# Altium PCB Line_trigger.PCBDOC (part 1 of 2)
Units mm, origin at the board's own origin, x right, y up, seen from the top; angles counter-clockwise.
Board outline 120 x 50.5 mm, 2 copper layers (TOP, BOT), stack 1.57 mm thick; 102 components, 41 nets, 280 pads, 76 vias.
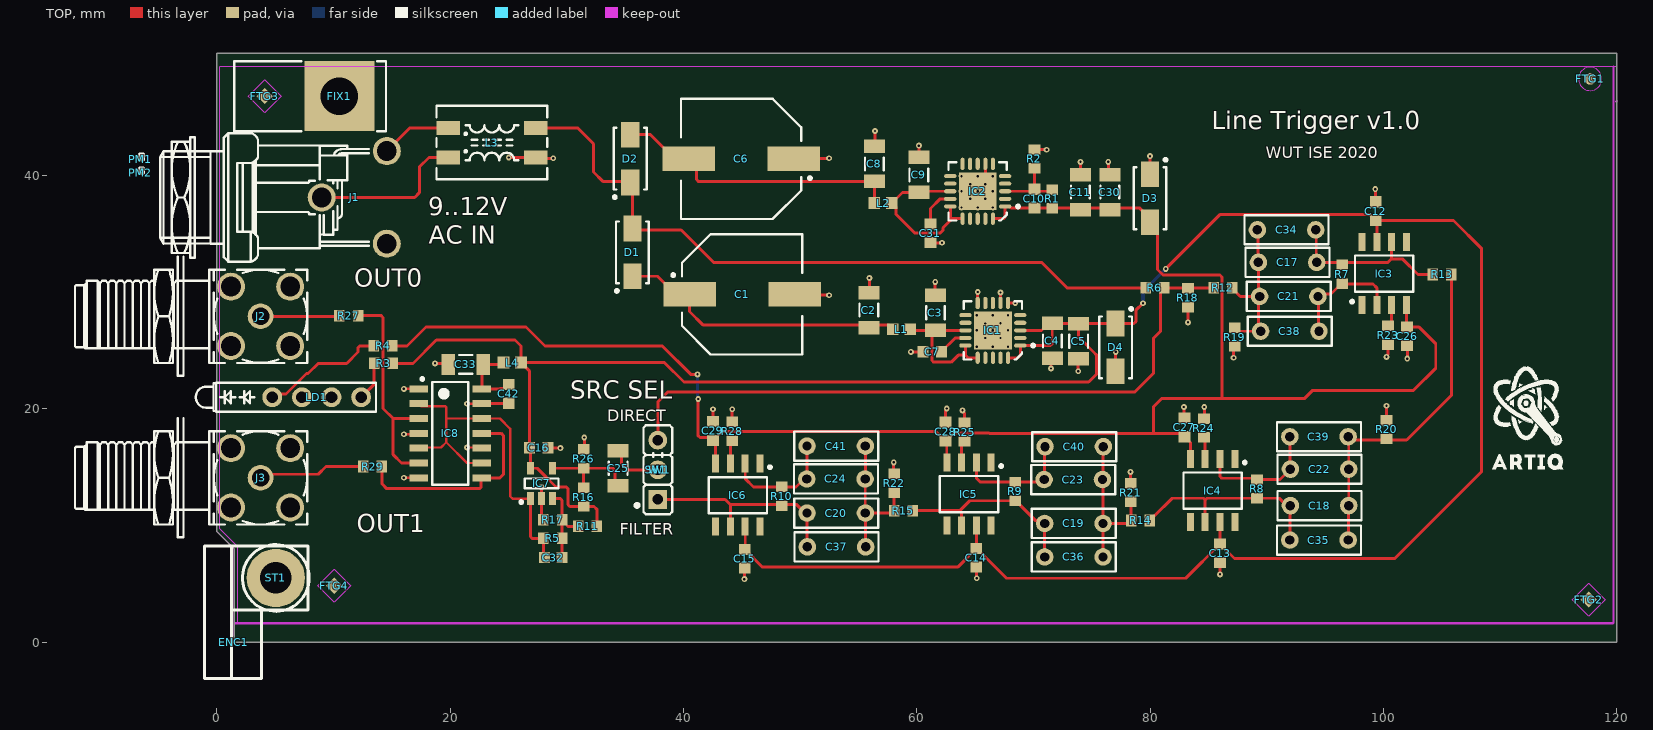
[diagram p0: TOP view]
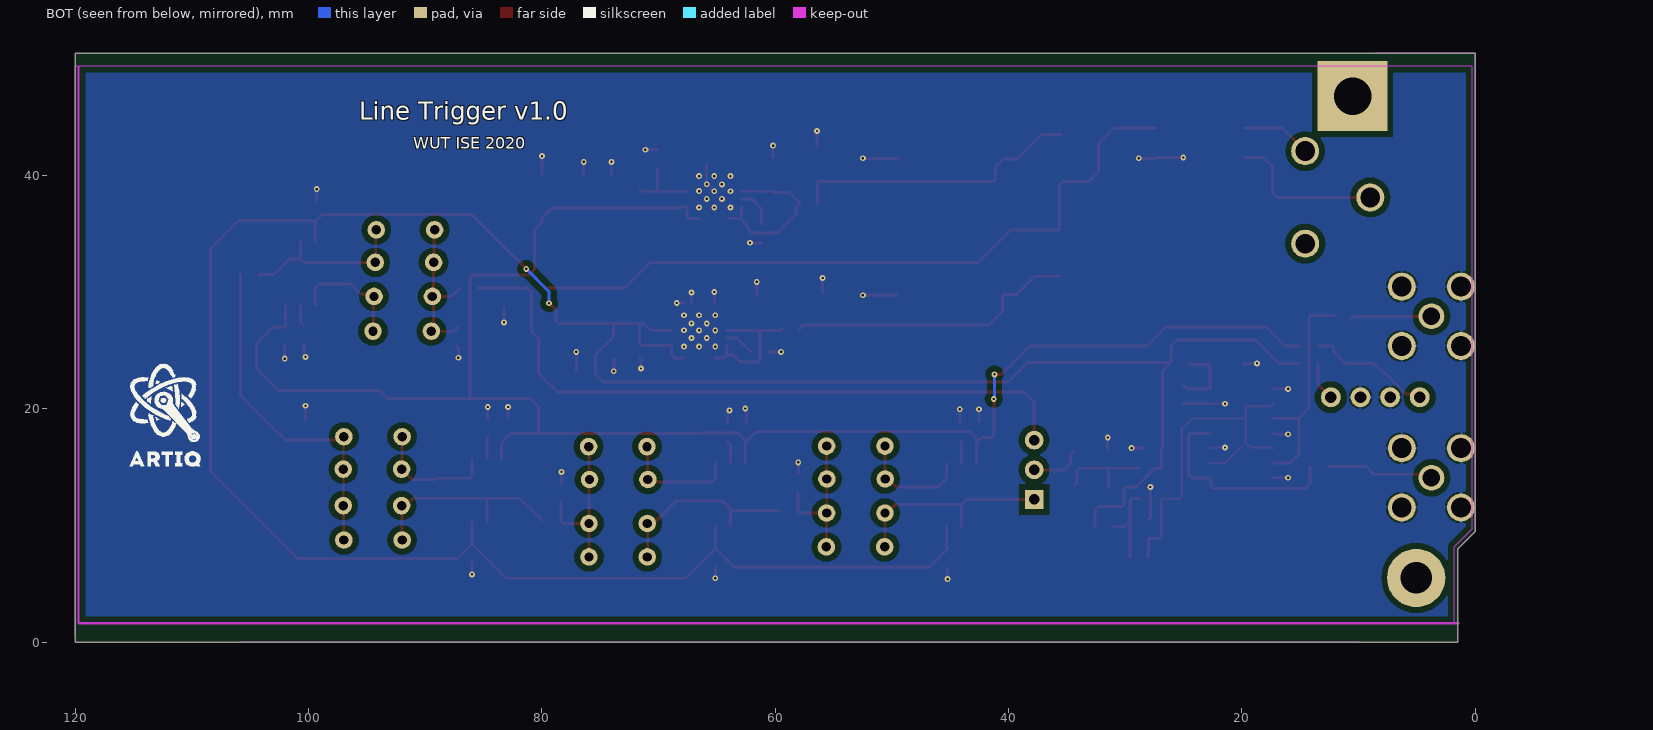
[diagram p1: BOT view, seen from below]
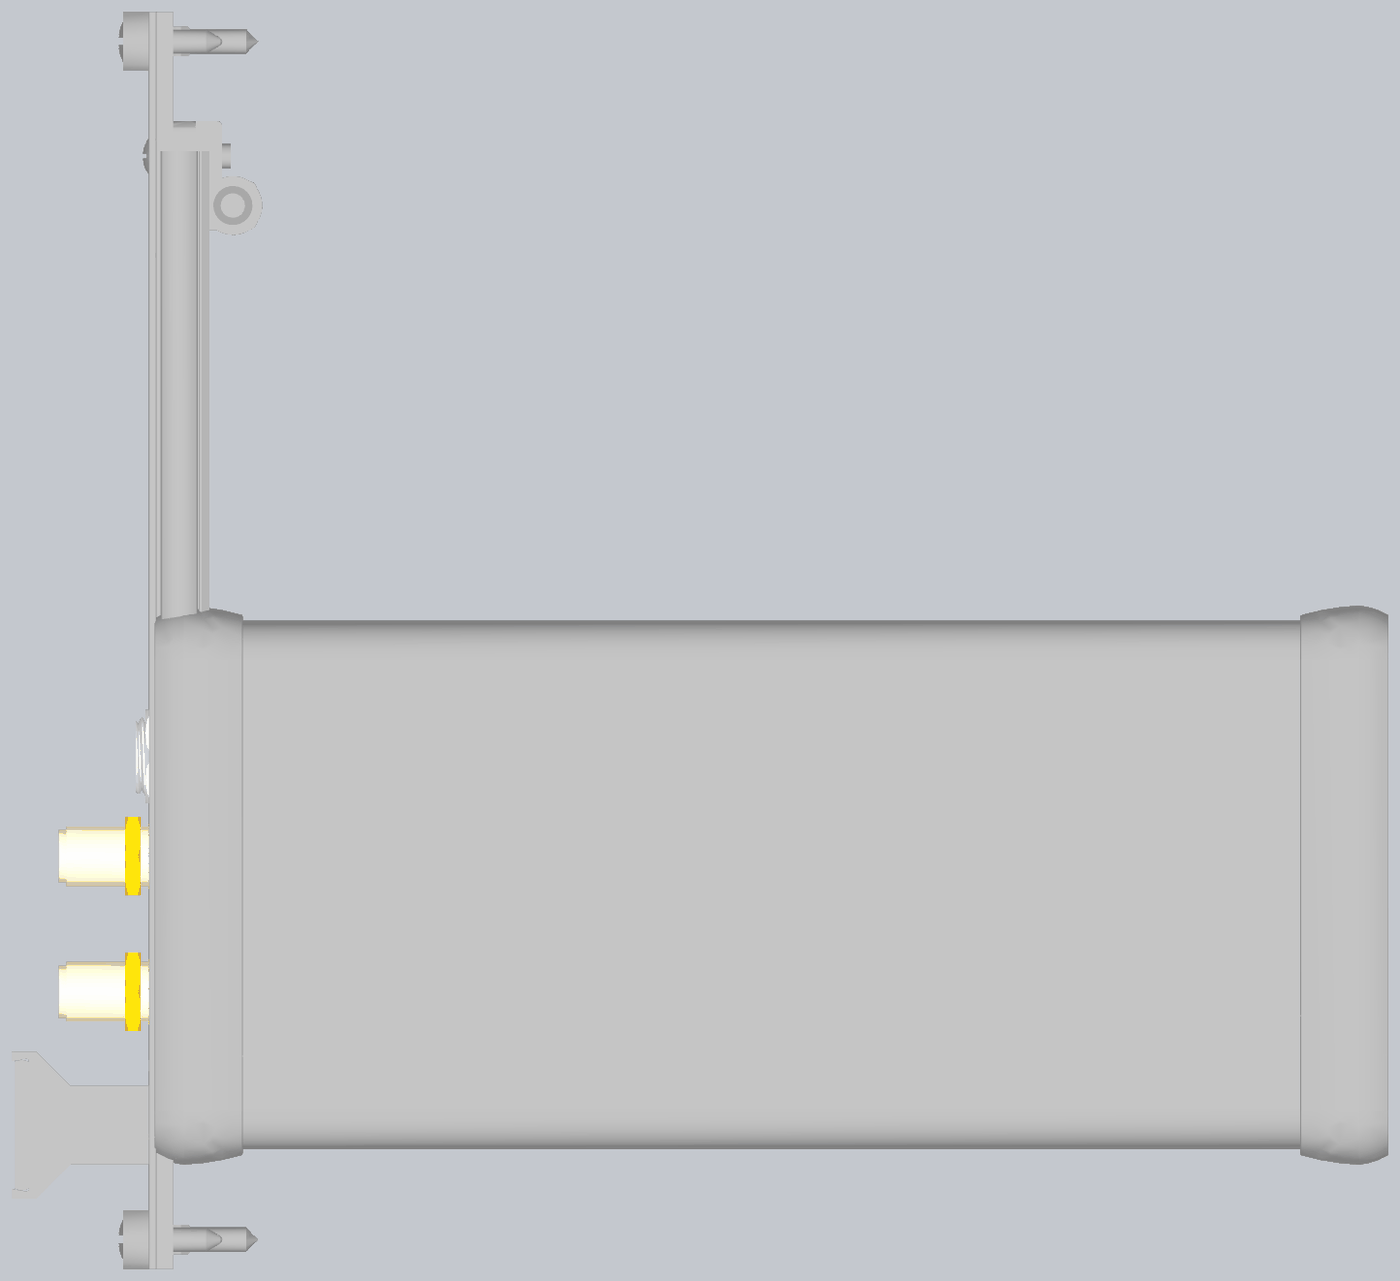
[diagram p2: 3D render of the assembled board from above, using the file's embedded part models]

## Layer stack, top to bottom
TopSolder: solder mask 0.01, Solder Resist, Dk 3.5
TOP: signal copper 0.035
Dielectric2: core 1.5, Core-042, Dk 4.6
BOT: signal copper 0.035
BottomSolder: solder mask 0.01, Solder Resist, Dk 3.5

## Board outline
0,14.5 0,50.5 9.038,50.5 120,50.5 120,0 1.5,0 1.5,8 0,9.5

## Design rules (kind name [scope] priority, off if disabled: settings)
AcuteAngle [All] p1: minimum=6.00000000000000E+0001 checktracksonly=FALSE
Clearance [All] p1: gap=0.15 ignorepadtopadclearanceinfootprint=FALSE except(0.5: Arc-Poly Track-Poly SMDPad-Poly THPad-Poly Via-Poly Fill-Poly Poly-Poly)
ComponentClearance [All] p1: gap=0 collisioncheckmode=3 verticalgap=0 showdistances=FALSE
DiffPairsRouting [All] p1: maxlimit=0.152 minlimit=0.127 mostfreqgap=0.152 toplayer_minwidth=0.127 toplayer_maxwidth=0.152 toplayer_prefwidth=0.152 bottomlayer_minwidth=0.127 bottomlayer_maxwidth=0.152 bottomlayer_prefwidth=0.152 maxuncoupledlength=12.7
FabricationTestPointUsage TestPointUsage [All] p1: valid=0 allowmultiple=FALSE
FabricationTestpoint Testpoint [All] p1: side=3 testpointundercomponent=TRUE minsize=1.016 maxsize=2.54 preferedsize=1.524 minholesize=0.508 maxholesize=1.016 preferedholesize=0.813 testpointgrid=0.025 allowsidetop=TRUE allowsidebottom=TRUE usegrid=TRUE gridtolerance=0
Height [All] p1: minheight=0 maxheight=40 prefheight=40
HoleSize [All] p1: absolutevalues=TRUE maxlimit=3.81 minlimit=0.025 maxpercent=80.000 minpercent=20.000
HoleToHoleClearance [All] p1: gap=0.025 allowstackedmicrovias=TRUE
MinimumSolderMaskSliver [All] p1: minsoldermaskwidth=0
PlaneClearance PlaneClearance_HV [InNetClass('HV')] p1: clearance=1
PlaneClearance [All] p2: clearance=0.2
PlaneConnect [All] p1: pad.planeconnectstyle=Relief pad.reliefexpansion=0.254 pad.reliefentries=4 pad.reliefconductorwidth=0.254 pad.reliefairgap=0.152 via.planeconnectstyle=Direct via.reliefexpansion=0.508 via.reliefentries=4 via.reliefconductorwidth=0.254 via.reliefairgap=0.254
PolygonConnect PolygonConnect_pad [All] p1: thpad.connectstyle=Relief thpad.reliefconductorwidth=0.254 thpad.reliefentries=4 thpad.polygonreliefangle="90 Angle" thpad.airgapwidth=0.152 smdpad.connectstyle=Relief smdpad.reliefconductorwidth=0.254 smdpad.reliefentries=4 smdpad.polygonreliefangle="90 Angle" smdpad.airgapwidth=0.152 via.connectstyle=Direct via.reliefconductorwidth=0.254 via.reliefentries=4 via.polygonreliefangle="90 Angle" via.airgapwidth=0.152
RoomDefinition Line_trigger [InComponentClass('Line_trigger')] p1: confinementstyle=ConfineIn formatcopy=TRUE lockcomponents=FALSE outline 68.114,16.002 68.114,2.007 95.788,2.007 95.788,16.002
RoutingVias [All] p1: holewidth=0.2 width=0.5 viastyle="Through Hole" minholewidth=0.2 minwidth=0.5 maxholewidth=1 maxwidth=2 useviatemplates=TRUE viatemplateguid#1={70856AC1-7712-4A2A-9A53-D965C1B5C259} viatemplatename#1=v50h20
SilkToSilkClearance [All] p1: silktosilkclearance=0
SilkToSolderMaskClearance SilkscreenOverComponentPads [IsPad] p1: minsilkscreentomaskgap=0 clearancetoexposedcopper=TRUE
SolderMaskExpansion [All] p1: expansion=0.051
ViasUnderSMD [All] p1: allowed=FALSE
Width [All] p1: maxlimit=2 minlimit=0.15 preferedwidth=0.254
18 further rules are at their usual default settings.

## Components (designator, comment, footprint, x,y, rotation, side; value= is the part's Value field where it differs from the comment)
C1 "470uF" CAPAE1030X1020N 45.013,29.82 r0 top
C2 "47uF" CAPC3216X180N 55.88,28.473 r270 top
C3 "47uF" CAPC3216X180N 61.595,28.245 r270 top
C4 "47uF" CAPC3216X180N 71.603,25.832 r90 top
C5 "47uF" CAPC3216X180N 73.863,25.795 r90 top
C6 "470uF" CAPAE1030X1020N 44.937,41.427 r180 top
C7 "1uF" CAPC1608X87N 61.316,24.892 r0 top
C8 "47uF" CAPC3216X180N 56.349,41.004 r270 top
C9 "47uF" CAPC3216X180N 60.173,40.056 r270 top
C10 "10nF" CAPC1608X87N 70.079,38.024 r270 top
C11 "47uF" CAPC3216X180N 74.016,38.583 r270 top
C12 "10nF" CAPC1608X87N 99.314,36.957 r90 top
C13 "10nF" CAPC1608X87N 85.979,7.62 r270 top
C14 "10nF" CAPC1608X87N 65.1,7.239 r270 top
C15 "10nF" CAPC1608X87N 45.237,7.163 r270 top
C16 "10nF" CAPC1608X87N 27.584,16.662 r0 top
C17 "33nF" CAPR500-250X720X650 91.77,32.563 r0 top
C18 "33nF" CAPR500-250X720X650 94.513,11.709 r180 top
C19 "33nF" CAPR500-250X720X650 73.457,10.185 r180 top
C20 "33nF" CAPR500-250X720X650 53.086,11.074 r180 top
C21 "33nF" CAPR500-250X720X650 91.872,29.642 r0 top
C22 "33nF" CAPR500-250X720X650 94.513,14.834 r180 top
C23 "33nF" CAPR500-250X720X650 73.406,13.945 r180 top
C24 "33nF" CAPR500-250X720X650 53.061,13.995 r180 top
C25 "47uF" CAPC3216X180N 34.392,14.91 r270 top
C26 "10nF" CAPC1608X87N 102.006,26.238 r270 top
C27 "10nF" CAPC1608X87N 82.931,18.415 r90 top
C28 "10nF" CAPC1608X87N 62.459,18.059 r90 top
C29 "10nF" CAPC1608X87N 42.52,18.11 r90 top
C30 "47uF" CAPC3216X180N 76.53,38.581 r270 top
C31 "1uF" CAPC1608X87N 61.163,35.052 r90 top
C32 "Undefined" CAPC1608X90N 28.842,7.264 r180 top
C33 "47uF" CAPC3216X180N 21.336,23.825 r0 top
C34 "27nF" CAPR500-250X720X650 91.684,35.351 r0 top
C35 "27nF" CAPR500-250X720X650 94.463,8.763 r180 top
C36 "27nF" CAPR500-250X720X650 73.457,7.315 r180 top
C37 "27nF" CAPR500-250X720X650 53.111,8.179 r180 top
C38 "27nF" CAPR500-250X720X650 91.963,26.658 r0 top
C39 "27nF" CAPR500-250X720X650 94.463,17.615 r180 top
C40 "27nF" CAPR500-250X720X650 73.482,16.764 r180 top
C41 "27nF" CAPR500-250X720X650 53.086,16.815 r180 top
C42 "10nF" CAPC1608X87N 25.016,21.282 r90 top
D1 "SS16" DIOM5127X229N 35.611,33.419 r90 top
D2 "SS16" DIOM5127X229N 35.433,41.453 r90 top
D3 "SS16" DIOM5127X229N 79.985,38.049 r270 top
D4 "SS16" DIOM5127X229N 77.038,25.273 r270 top
ENC1 "Hammond_1455C1202_Line_Trigger" Hammond_1455C1202_Thermostat 1.45,0 r0 top locked
FIX1 "PMB-1" PMB-1 10.501,46.804 r180 top
FTG1 "Use only in PCB" FIDUCIAL_TOP_C100-200 117.704,48.285 r90 top
FTG2 "Use only in PCB" FIDUCIAL_TOP_S100-200 117.577,3.658 r90 top
FTG3 "Use only in PCB" FIDUCIAL_TOP_S100-200 4.115,46.812 r90 top
FTG4 "Use only in PCB" FIDUCIAL_TOP_S100-200 10.058,4.851 r90 top
IC1 "TPS7A4700RGWT" QFN65P500X500X100-21N-S325 66.514,26.732 r180 top
IC2 "TPS7A3301RGWT" QFN65P500X500X100-21N-S325 65.214,38.654 r180 top
IC3 "OPA197ID" SOIC127P600X175-8N 100.051,31.598 r90 top
IC4 "OPA197ID" SOIC127P600X175-8N 85.344,13.005 r270 top
IC5 "OPA197ID" SOIC127P600X175-8N 64.465,12.7 r270 top
IC6 "OPA197ID" SOIC127P600X175-8N 44.653,12.606 r270 top
IC7 "ADCMP600BRJZ-R2" SOT95P280X145-5N 27.834,13.614 r90 top
IC8 "SN74LV125AD" SOIC127P600X175-14N 20.008,17.907 r0 top
J1 "Jack" SWITCHCRAFT_722RA 8.992,38.125 r270 top locked
J2 "SMA" RF249BT0050GHDW 3.749,27.94 r180 top locked
J3 "SMA" RF249BT0050GHDW 3.749,14.097 r180 top locked
L1 "120R@100MHz" INDC1608X65N 58.675,26.833 r0 top
L2 "120R@100MHz" INDC1608X65N 57.099,37.643 r0 top
L3 "2x4.7mH" IND_WURTH_WE-SL2 23.571,42.824 r0 top
L4 "120R@100MHz" INDC1608X65N 25.324,23.978 r180 top
LD1 "Green/Green" LED_DIALIGHT_571-0122F 4.75,21.006 r0 top locked
PM1 "77DE-06-09" AC_AC_77DE-06-09 -6.579,41.402 r90 top
PM2 "WAU12-200" AC_AC_WAU12-200 -6.579,40.234 r90 top
R1 "330k" RESC1608X55N 71.603,38.004 r270 top
R2 "100k" RESC1608X55N 70.079,41.427 r270 top
R3 "1k" RESC1608X55N 14.287,23.901 r180 top
R4 "1k" RESC1608X55N 14.249,25.4 r180 top
R5 "510k" RESC1608X55N 28.784,8.903 r180 top
R6 "6k8" RESC1608X55N 80.394,30.378 r180 top
R7 "910k" RESC1608X55N 96.444,31.547 r90 top
R8 "1M5" RESC1608X55N 89.154,13.145 r270 top
R9 "430k" RESC1608X55N 68.428,12.929 r270 top
R10 "510k" RESC1608X55N 48.412,12.509 r270 top
R11 "6k8" RESC1608X55N 31.769,9.931 r180 top
R12 "180k" RESC1608X55N 86.233,30.378 r0 top
R13 "270k" RESC1608X55N 105.016,31.521 r0 top
R14 "200k" RESC1608X55N 79.172,10.439 r180 top
R15 "240k" RESC1608X55N 58.852,11.278 r180 top
R16 "24k" RESC1608X55N 31.445,12.446 r270 top
R17 "6k8" RESC1608X55N 28.784,10.503 r0 top
R18 "1k" RESC1608X55N 83.236,29.528 r90 top
R19 "6k8" RESC1608X55N 87.249,26.162 r90 top
R20 "10k" RESC1608X55N 100.254,18.237 r270 top
R21 "20k" RESC1608X55N 78.334,12.827 r270 top
R22 "24k" RESC1608X55N 58.052,13.627 r270 top
R23 "910k" RESC1608X55N 100.381,26.314 r90 top
R24 "1M5" RESC1608X55N 84.607,18.364 r270 top
R25 "430k" RESC1608X55N 64.084,18.009 r270 top
R26 "24k" RESC1608X55N 31.445,15.723 r270 top
R27 "49R9" RESC1608X55N 11.301,27.991 r180 top
R28 "510k" RESC1608X55N 44.171,18.085 r270 top
R29 "49R9" RESC1608X55N 13.348,15.062 r180 top
ST1 "SCHROFF_PANEL_3U_4HP-Line_Trigger" "SCHROFF_PANEL_3HP_4U - Line_Trigger" 5.055,5.512 r0 top locked
SW1 "Jumper Type1" STELVIO-KONTEK_3131730000400 37.795,14.783 r90 top
W1 "Test Point" COMATEL_385.0358.1.03.400 37.795,12.243 r90 top

## Footprints (in the part's own frame and the unit in brackets; to place one, negate y for a bottom-side part, rotate by r counter-clockwise, add the part's x,y. Pads: shape width x height; smd on the part's side, far side on the other; paste and mask are expansions set on the pad)
AC_AC_77DE-06-09 [mm] "AC adapter"
  silkscreen extent -0.05,-0.28 0.43,0.05
AC_AC_WAU12-200 [mm] "AC adapter"
  silkscreen extent -0.05,-0.28 0.43,0.05
CAPAE1030X1020N [mm] "Capacitor, Aluminium Electrolytric, 10.3mm L X 10.3mm W X 10.2mm H, IPC Medium Density"
  rect 4.5x2.1 smd: 1(-4.5,0) 2(4.5,0)
  silkscreen extent -6.02,-5.15 5.15,5.15, body extent -6,-5.25 6,5.25, height 10.2
CAPC1608X87N [mm] "Chip Capacitor, Body 1.6x0.8mm IPC Medium Density"
  rect 0.95x1 smd: 1(-0.8,0) 2(0.8,0)
  body extent -0.87,-0.47 0.88,0.48, height 0.87
CAPC1608X90N [mm] "Chip Capacitor, Body 1.6x0.8mm IPC Medium Density"
  rect 0.95x0.95 smd: 1(-0.75,0) 2(0.75,0)
  body extent -0.85,-0.45 0.85,0.45, height 0.9
CAPC3216X180N [mm] "Chip Capacitor, Body 3.2x1.6mm, IPC Medium Density"
  rect 1.15x1.8 smd: 1(-1.5,0) 2(1.5,0)
  silkscreen extent -0.55,-0.8 0.55,0.8, body extent -1.7,-0.9 1.7,0.9, height 1.8
CAPR500-250X720X650 [mm] "Capacitor Radial, Pin spacing 5.0mm - Body With 2.5mm X Body Length 7.2mm X Body Height 6.5mm"
  round 1.5 hole 0.8: 1(-2.5,0) 2(2.5,0)
  silkscreen extent -3.6,-1.25 3.6,1.25, body extent -3.6,-1.25 3.6,1.25, height 6.5
COMATEL_385.0358.1.03.400 [mm] "3 Contacts Straight Strip Header Pitch 2.54mm L=6.3mm ''Mini-Wire-Wrap''"
  rect 1.6x1.6 hole 0.9: 1(0,0)
  round 1.6 hole 0.9: 2(2.54,0) 3(5.08,0)
  silkscreen extent -1.27,-1.23 6.35,1.93, body extent -1.27,-1.22 6.35,1.23, height 8
DIOM5127X229N [mm] "DO-214-AC/SMA Molded Diode, 2-Leads, Body 5.1x2.7mm, IPC Medium Density"
  rect 2.2x1.55 smd: 1(-2.05,0) 2(2.05,0)
  silkscreen extent -3.42,-1.4 2.65,1.45, body extent -2.67,-1.45 2.68,1.45, height 2.29
FIDUCIAL_TOP_C100-200 [mm] "Round Fiducial Target, Top Layer, 1.0mm, Top Solder 2.0mm, Keepout =2.0mm"
  round 1 smd paste-0.51 mask+0.5: FTG2(0,0)
  TOP keep-out circle w0.1: c0,0 r1
FIDUCIAL_TOP_S100-200 [mm] "Square Fiducial Target, Top Layer, 1.0mm, Top Solder 2.0mm, Keepout =2.0mm"
  rect 1x1 smd rot 45 paste-0.51 mask+0.5: 1(0,0)
  TOP keep-out region: 1.414,0 0,-1.414 -1.414,0 0,1.414
Hammond_1455C1202_Thermostat [mm]
  body extent -4.4,-3.59 121.6,53.55, height 19.26
IND_WURTH_WE-SL2 [mm] "Common Mode SMD Line Filter WE-SL2"
  rect 2x1.2 smd: 1(-3.75,1.27) 2(-3.75,-1.27) 3(3.75,-1.27) 4(3.75,1.27)
  silkscreen extent -4.75,-3.15 4.75,3.15, body extent -4.75,-3.15 4.75,3.15, height 5.3
INDC1608X65N [mm] "Chip Inductor, 2-Leads, EIA 0603, Metric 1608, Body 1.6x0.8mm, IPC Medium Density"
  rect 1x1 smd: 1(-0.75,0) 2(0.75,0)
  body extent -0.87,-0.47 0.88,0.48, height 0.65
LED_DIALIGHT_571-0122F [mm] "2x 2mm LED (Top: Green, Bot: Green) PCB Edge Mounting (Without positioning pins) DIALIGHT 571 Serie"
  round 1.7 hole 1: 1(0,0) 2(2.54,0) 3(5.08,0) 4(7.62,0)
  silkscreen extent -6.55,-1.24 8.89,1.24, body extent -6.55,-1.24 8.89,1.24, height 8.61
PMB-1 [mm] "PCB fixing"
  rect 6x6 hole 3.2: 1(0,0)
  silkscreen extent -4,-3 9,3, body extent -4,-3 10.7,3, height 16
QFN65P500X500X100-21N-S325 [mm] "QFN, 0.65mm pitch,square; 20 pin, 5mm X 5mm X 1mm H body (w/thermal tab 3.25 X 3.25mm),  IPC Medium Density"
  oval 1.05x0.35 smd: 1(-2.35,1.3) 2(-2.35,0.65) 3(-2.35,0) 4(-2.35,-0.65) 5(-2.35,-1.3) 11(2.35,-1.3) 12(2.35,-0.65) 13(2.35,0) 14(2.35,0.65) 15(2.35,1.3)
  oval 0.35x1.05 smd: 6(-1.3,-2.35) 7(-0.65,-2.35) 8(0,-2.35) 9(0.65,-2.35) 10(1.3,-2.35) 16(1.3,2.35) 17(0.65,2.35) 18(0,2.35) 19(-0.65,2.35) 20(-1.3,2.35)
  rect 3.25x3.25 smd: 21(0,0)
  silkscreen extent -3.58,-2.5 2.5,2.5, body extent -2.57,-2.57 2.58,2.58, height 1
RESC1608X55N [mm] "Chip Resistor, EIA 0603, Metric 1608, Body 1.6x0.8mm, IPC Medium Density"
  rect 0.9x1 smd: 1(-0.8,0) 2(0.8,0)
  body extent -0.87,-0.47 0.88,0.48, height 0.55
RF249BT0050GHDW [mm] "50 Ohm Through Hole SMA Right Angle PCB Jack"
  round 2.2 hole 1.5: 1(0,0)
  round 2.4 hole 1.7: 2(-2.54,2.54) 2(-2.54,-2.54) 2(2.54,2.54) 2(2.54,-2.54)
  silkscreen extent -4,-5.1 15.9,5.1, body extent -3.5,-5.1 16.47,5.1, height 11.45
"SCHROFF_PANEL_3HP_4U - Line_Trigger" [mm] "Schroff PCB 3HP 4U Eurocard Panel Kit"
  round 5 hole 2.7: 0(0,0)
  silkscreen extent -6.1,-8.6 2.75,2.75, body extent -22.6,-19.75 3,108.65, height 16.94
SOIC127P600X175-8N [mm] "SOIC 8, Pitch 1.27mm - Body 4x5mm, IPC Medium Density"
  rect 1.55x0.6 smd: 1(-2.7,1.905) 2(-2.7,0.635) 3(-2.7,-0.635) 4(-2.7,-1.905) 5(2.7,-1.905) 6(2.7,-0.635) 7(2.7,0.635) 8(2.7,1.905)
  silkscreen extent -2.52,-2.5 1.55,2.88, body extent -3.1,-2.5 3.1,2.5, height 1.75
SOIC127P600X175-14N [mm] "SOIC 14, Pitch 1.27mm - Body 4x8.75mm, IPC Medium Density"
  rect 1.55x0.6 smd: 1(-2.7,3.81) 2(-2.7,2.54) 3(-2.7,1.27) 4(-2.7,0) 5(-2.7,-1.27) 6(-2.7,-2.54) 7(-2.7,-3.81) 8(2.7,-3.81) 9(2.7,-2.54) 10(2.7,-1.27) 11(2.7,0) 12(2.7,1.27) 13(2.7,2.54) 14(2.7,3.81)
  silkscreen extent -2.52,-4.4 1.55,4.78, body extent -3.1,-4.37 3.1,4.38, height 1.75
SOT95P280X145-5N [mm] "SOT, 0.95mm pitch; 5 pin, 1.60mm W X 2.90mm L X 1.45mm H body, IPC Medium Density"
  rect 1.1x0.6 smd: 1(-1.3,0.95) 2(-1.3,0) 3(-1.3,-0.95) 4(1.3,-0.95) 5(1.3,0.95)
  silkscreen extent -1.72,-1.45 0.43,1.87, body extent -1.4,-1.5 1.4,1.5, height 1.45
STELVIO-KONTEK_3131730000400 [mm] "Black Insulated Jumper Pitch 2.54mm W=2.5mm L=5mm H=6.5mm"
  round 0.9 smd paste-0.46 mask-0.46: 1(0,0)
  silkscreen extent 1.1,-0.38 1.44,0.38, body extent -1.23,-1.25 3.77,1.25, height 6.5
SWITCHCRAFT_722RA [mm] "2.1 mm Center Pin, 5A, 48VDC, Right Angle, Through Hole, Locking Power Jack Connector (Threaded Bushings)"
  round 2.4 hole 1.7: 1(-3.972,5.578) 2(0,0) 3(3.965,5.573)
  silkscreen extent -5.51,-13.85 5.51,4.04, body extent -5.51,-13.85 5.51,6.96, height 13.89

## Part data
C1 C6: library part CAE1030-1020_470UF_25V_20%, "Polarised capacitor", Case=G, Manufacturer=PANASONIC, Manufacturer Part Number=EEEFK1E471AP, Tolerance=±20%, Voltage=25V, Author="CERN DEM JLC", Component Type=Standard, ComponentHeight=10.2mm, CreateDate=03.12.2007, HelpURL=\\cern.ch\dfs\Applications\Altium\Datasheets\CAE_PANASONIC_FK.pdf, LatestRevisionDate=05.11.2014, Mounted=Yes, Part Description="Aluminum Electrolytic SMT Capacitor", Part Number=CAE1030-1020_470UF_25V_20%, Pin Count=2, Sense=No, SMD=Yes, Socket=No, Status="Not Recommended"
C2 C3 C4 C5 C8 C9 C11 C25 C30 C33: library part CC1206_47UF_25V_20%_X5R, "Non-polarised capacitor", Case=1206, Manufacturer=GENERIC, Manufacturer1 ComponentHeight=1.8mm, Manufacturer1 Example=TDK, Manufacturer1 Part Number=C3216X5R1E476M160AC, Tolerance=±20%, Voltage=25V, Author="CERN DEM JLC", Component Type=Standard, CreateDate=20.11.2013, HelpURL=\\cern.ch\dfs\Applications\Altium\Datasheets\CC1206_X5R_TDK_C.pdf, LatestRevisionDate=14.03.2017, Manufacturer Part Number=CC1206_47UF_25V_20%_X5R, Mounted=Yes, Part Description="SMD Multilayer Chip Ceramic Capacitor", Part Number=CC1206_47UF_25V_20%_X5R, Pin Count=2, Sense=No, SMD=Yes, Socket=No, Status=None, TC=X5R
C7 C31: library part CC0603_1UF_25V_10%_X7R, "Non-polarised capacitor", Case=0603, Manufacturer=GENERIC, Manufacturer1 ComponentHeight=0.9mm, Manufacturer1 Example=MURATA, Manufacturer1 Part Number=GRM188R71E105KA12D, Tolerance=±10%, Voltage=25V, Author="CERN DEM JLC", Component Type=Standard, CreateDate=18.01.2011, HelpURL=\\cern.ch\dfs\Applications\Altium\Datasheets\CC0603_X7R_MURATA.pdf, LatestRevisionDate=18.01.2011, Manufacturer Part Number=CC0603_1UF_25V_10%_X7R, Mounted=Yes, Part Description="SMD Multilayer Chip Ceramic Capacitor", Part Number=CC0603_1UF_25V_10%_X7R, Pin Count=2, Sense=No, SMD=Yes, Socket=No, Status=None, TC=X7R
C10 C12 C13 C14 C15 C16 C26 C27 C28 C29 C42: library part CC0603_10NF_50V_10%_X7R, "Non-polarised capacitor", Case=0603, Manufacturer=GENERIC, Manufacturer1 ComponentHeight=0.87mm, Manufacturer1 Example=PHYCOMP, Manufacturer1 Part Number=223858615636, Tolerance=±10%, Voltage=50V, Author="CERN DEM JLC", Component Type=Standard, CreateDate=03/12/2007, HelpURL=\\cern.ch\dfs\Applications\Altium\Datasheets\CC0603_X7R_PHYCOMP.pdf, LatestRevisionDate=03/12/2007, Manufacturer Part Number=CC0603_10NF_50V_10%_X7R, Mounted=Yes, Part Description="SMD Multilayer Chip Ceramic Capacitor", Part Number=CC0603_10NF_50V_10%_X7R, Pin Count=2, Sense=No, SMD=Yes, Socket=No, Status=Preferred, TC=X7R
C17 C18 C19 C20 C21 C22 C23 C24: "Non-polarised capacitor", Case="LS5 W2.5 x L7.2 x H6.5", Manufacturer=TDK, Manufacturer Part Number=B32529C0333J000, Part Number=CPER_33NF_63V_10%_500-250X720X650, Tolerance=±5%, Voltage=63VDC/40VAC, Author=GK, Component Type=Standard, ComponentHeight=6.5mm, CreateDate=19.12.2007, HelpURL=\\cern.ch\dfs\Applications\Altium\Datasheets\CPER_TDK_B32529.pdf, LatestRevisionDate=22.04.2015, Mounted=Yes, Part Description="Metallized Polyester Film Capacitor (MKT)", Pin Count=2, Sense=No, SMD=No, Socket=No, Status=None
C32: library part CC0603_NO-VALUE, "Non-polarised capacitor", Case=0603, Manufacturer1 ComponentHeight=0.9mm, Author="CERN DEM MR", Component Type=Standard, CreateDate=22.11.2016, HelpURL=Undefined, LatestRevisionDate=22.11.2016, Manufacturer=Undefined, Manufacturer Part Number=CC0603_NO-VALUE, Mounted=No, Part Description="Reserved Footprint For 0603(1608) Chip Ceramic Capacitor", Part Number=CC0603_NO-VALUE, Pin Count=2, Sense=No, SMD=Yes, Socket=No, Status=None
C34 C35 C36 C37 C38 C39 C40 C41: "Non-polarised capacitor", Case="LS5 W2.5 x L7.2 x H6.5", Manufacturer=TDK, Manufacturer Part Number=B32529C0273J000, Part Number=CPER_27NF_63V_10%_500-250X720X650, Tolerance=±5%, Voltage=63VDC/40VAC, Author=GK, ComponentHeight=6.5mm, Component Type=Standard, CreateDate=19.12.2007, HelpURL=\\cern.ch\dfs\Applications\Altium\Datasheets\CPER_TDK_B32529.pdf, LatestRevisionDate=22.04.2015, Mounted=Yes, Part Description="Metallized Polyester Film Capacitor (MKT)", Pin Count=2, Sense=No, SMD=No, Socket=No, Status=None
D1 D2 D3 D4: "Schottky Diode", Case=DO-214AC, Manufacturer="VISHAY GENERAL SEMICONDUCTOR", Power=1A, Voltage=60V, Author="CERN DEM JLC", Bonding=No, Component Type=Standard, ComponentHeight=2.29mm, CreateDate=15.07.2008, Device=SS16, HelpURL=\\cern.ch\dfs\Applications\Altium\Datasheets\SS16.pdf, LatestRevisionDate=23.08.2010, Manufacturer Part Number=SS16, Mounted=Yes, PackageDescription="DO-214-AC Molded Diode, Body 5.1x2.7mm, IPC Medium Density", Part Description="Surface Mount Schottky Barrier Rectifier", Part Number=SS16, Pin Count=2, PressFit=No, Sense=No, SMD=Yes, Socket=No
ENC1: library part Hammond_1455C1202_Thermostat, "Hammond_1455C1202_Line_Trigger enclosure"
FIX1: library part MECH_PCB_FIX_RA, "right angle PCB fixing"
FTG1: library part FIDUCIAL_TARGET_C100-200, "Fiducial Target", Author="CERN DEM JLC", Component Type="Standard (No BOM)", ComponentHeight=0mm, CreateDate=09.02.2010, Family=Fiducial, HelpURL=Undefined, LatestRevisionDate=04.04.2012, Mounted=No, PackageDescription="Round Fiducial Target, Top Layer, 1.0mm, Top Solder 2.0mm, Keepout =2.0mm", Part Description="Round Fiducial Target, Top Layer, 1.0mm, Top Solder 2.0mm, Keepout =2.0mm", Part Number=FIDUCIAL_TARGET_C100-200, Pin Count=1, Sense=No, SMD=Yes, Socket=No, Status=None
FTG2 FTG3 FTG4: library part FIDUCIAL_TARGET_S100-200, "Fiducial Target", Author="CERN DEM JLC", Component Type="Standard (No BOM)", ComponentHeight=0mm, CreateDate=09.02.2010, Family=Fiducial, HelpURL=Undefined, LatestRevisionDate=04.04.2012, Mounted=No, PackageDescription="Square Fiducial Target, Top Layer, 1.0mm, Top Solder 2.0mm, Keepout =2.0mm", Part Description="Square Fiducial Target, Top Layer, 1.0mm, Top Solder 2.0mm, Keepout =2.0mm", Part Number=FIDUCIAL_TARGET_S100-200, Pin Count=1, Sense=No, SMD=Yes, Socket=No, Status=None
IC1: "Low Noise (3uVrms), 1A, High Voltage Low-Dropout Linear Regulator", Case=QFN20, Manufacturer="TEXAS INSTRUMENTS", Author="CERN DEM JLC", Bonding=No, Component Type=Standard, ComponentHeight=1mm, CreateDate=03/07/2012, Device=TPS7A4700RGWT, HelpURL=\\cern.ch\dfs\Applications\Altium\Datasheets\TPS7A4700RGWT.pdf, LatestRevisionDate=03/07/2012, Manufacturer Part Number=TPS7A4700RGWT, Mounted=Yes, PackageDescription="QFN, 0.65mm pitch,square; 20 pin, 5mm X 5mm X 1mm H body (w/thermal tab 3.25 X 3.25mm),  IPC Medium Density", Part Description="1.4V to 19.1V, 1A, Low Noise (3.5uVrms), Low-Dropout Linear Regulator", Part Number=TPS7A4700RGWT, Pin Count=21, PressFit=No, Sense=No, SMD=Yes, Socket=No
IC2: "-1.18V to -33V -1A, Ultra-Low Noise, High PSRR, Low-Dropout Linear Regulator", Case=QFN20, Manufacturer="TEXAS INSTRUMENTS", Author="CERN DEM JLC", Bonding=No, Component Type=Standard, ComponentHeight=1mm, CreateDate=03/07/2012, Device=TPS7A3301RGWT, HelpURL=\\cern.ch\dfs\Applications\Altium\Datasheets\TPS7A3301RGWT.pdf, LatestRevisionDate=03/07/2012, Manufacturer Part Number=TPS7A3301RGWT, Mounted=Yes, PackageDescription="QFN, 0.65mm pitch,square; 20 pin, 5mm X 5mm X 1mm H body (w/thermal tab 3.25 X 3.25mm),  IPC Medium Density", Part Description="-1.18V to -33V, -1A, Ultra-Low Noise, High PSRR, Low-Dropout Linear Regulator", Part Number=TPS7A3301RGWT, Pin Count=21, PressFit=No, Sense=No, SMD=Yes, Socket=No
IC3 IC4 IC5 IC6: "36-V, Precision, Rail-to-Rail Input/Output, Low Offset Voltage, Operational Amplifiers", Case=SOIC8, Manufacturer="TEXAS INSTRUMENTS", Author=GK, Bonding=No, Component Type=Standard, ComponentHeight=1.75mm, CreateDate=22.07.2015, Device=OPA197ID, HelpURL=\\cern.ch\dfs\Applications\Altium\Datasheets\OPA192ID.pdf, LatestRevisionDate=22.07.2015, Manufacturer Part Number=OPA197ID, Mounted=Yes, PackageDescription="SOIC 8, Pitch 1.27mm - Body 4x5mm, IPC Medium Density", Part Description="36-V, Precision, Rail-to-Rail Input/Output, Low Offset Voltage, Operational Amplifiers", Part Number=OPA197ID, Pin Count=5, PressFit=No, Sense=No, SMD=Yes, Socket=No
IC7: "Rail-to-Rail, Very Fast, 2.5 V to 5.5 V Single-Supply TTL/CMOS Comparator", Case=SOT23-5, Manufacturer="ANALOG DEVICES", Author="CERN DEM JLC", Bonding=No, Component Type=Standard, ComponentHeight=1.45mm, CreateDate=25.04.2012, Device=ADCMP600BRJZ-R2, HelpURL=\\cern.ch\dfs\Applications\Altium\Datasheets\ADCMP600BRJZ-R2.pdf, LatestRevisionDate=25.04.2012, Manufacturer Part Number=ADCMP600BRJZ-R2, Mounted=Yes, PackageDescription="SOT, 0.95mm pitch; 5 pin, 1.60mm W X 2.90mm L X 1.45mm H body, IPC Medium Density", Part Description="Rail-to-Rail, Very Fast, 2.5 V to 5.5 V Single-Supply TTL/CMOS Comparator", Part Number=ADCMP600BRJZ-R2, Pin Count=5, PressFit=No, Sense=No, SMD=Yes, Socket=No
IC8: "Quadruple Bus Buffer with 3-State Outputs", Case=SOIC14, Manufacturer="TEXAS INSTRUMENTS", Author="CERN DEM JLC", Bonding=No, Component Type=Standard, ComponentHeight=1.75mm, CreateDate=09.03.2011, Device=SN74LV125AD, HelpURL=\\cern.ch\dfs\Applications\Altium\Datasheets\SN74LV125AD.pdf, LatestRevisionDate=09.03.2011, Manufacturer Part Number=SN74LV125AD, Mounted=Yes, PackageDescription="SOIC 14, Pitch 1.27mm - Body 4x8.75mm, IPC Medium Density", Part Description="Quadruple Bus Buffer with 3-State Outputs", Part Number=SN74LV125AD, Pin Count=14, PressFit=No, Sense=No, SMD=Yes, Socket=No
J1: "2.1 mm Center Pin, 5A, 48V, Right Angle, Through Hole, , DC Power Jack Connector", Manufacturer=SWITCHCRAFT, Manufacturer Part Number=722RA, Part Number=SWITCHCRAFT_722RA, Author=GK, Component Type=Standard, ComponentHeight=13.8mm, CreateDate=19.12.2017, Family=Jack, HelpURL=\\cern.ch\dfs\Applications\Altium\Datasheets\SWITCHCRAFT_712RA.pdf, LatestRevisionDate=19.12.2017, Mounted=Yes, Part Description="2.1 mm Center Pin, 5A, 48VDC, Right Angle, Through Hole, Locking Power Jack Connector (Threaded Bushings)", Pin Count=3, PressFit=No, Sense=No, SMD=No, Socket=No, Status=None
J2 J3: "50 Ohm Through Hole SMA Right Angle PCB Jack", Manufacturer=AdamTech, Manufacturer Part Number=RF249BT0050GHDW, Part Number=AdamTech_RF249BT0050GHDW, Author=GK, Component Type=Standard, ComponentHeight=10.44mm, CreateDate=06.10.2016, Family=SMA, HelpURL=\\cern.ch\dfs\Applications\Altium\Datasheets\AMPHENOL_132203.pdf, LatestRevisionDate=06.10.2016, Mounted=Yes, Part Description="50 Ohm Through Hole SMA Right Angle PCB Jack", Pin Count=5, PressFit=No, Sense=No, SMD=No, Socket=No, Status=None
L1 L2 L4: library part IND0603_MURATA_BLM18SG121TN1D, "Inductor", Case=0603, Manufacturer=MURATA, Manufacturer Part Number=BLM18SG121TN1D, Power=3A, Resistance=0.025R, Tolerance=±25%, Author="CERN DEM JLC", Component Type=Standard, ComponentHeight=0.65mm, CreateDate=23.07.2014, HelpURL=\\cern.ch\dfs\Applications\Altium\Datasheets\IND0603_MURATA_BLM18S.pdf, LatestRevisionDate=23.07.2014, Mounted=Yes, Part Description="SMD EMIFIL Suppression Chip Ferrite Bead", Part Number=IND0603_MURATA_BLM18SG121TN1D, Pin Count=2, Sense=No, SMD=Yes, Socket=No, Status=None
L3: library part IND_4.7MH_50%_WURTH_WE-SL2-744220, "Inductor Common Mode", Manufacturer="WURTH ELEKTRONIK", Manufacturer Part Number=744220, Power=500mA, Resistance=0.75R, Tolerance=±50%, Author="CERN DEM MR", Component Type=Standard, ComponentHeight=5.3mm, CreateDate=29.06.2017, HelpURL=\\cern.ch\dfs\Applications\Altium\Datasheets\IND_WURTH_WE-SL2_744220.pdf, LatestRevisionDate=29.06.2017, Mounted=Yes, Part Description="Common Mode SMD Line Filter (WE-SL2 Series)", Part Number=IND_4.7MH_50%_WURTH_WE-SL2-744220, Pin Count=4, Sense=No, SMD=Yes, Socket=No, Status=None
LD1: library part LED_DIALIGHT_571-0122F, "LED x2 Green 1C2A-BOT_3C4A-TOP", Manufacturer=DIALIGHT, Manufacturer Part Number=571-0122F, Author="CERN DEM JLC", Bonding=No, Color=Green/Green, Component Type=Standard, ComponentHeight=8.6mm, CreateDate=09.11.2009, HelpURL=\\cern.ch\dfs\Applications\Altium\Datasheets\LED_DIALIGHT_571-0122F.pdf, LatestRevisionDate=17.03.2010, Mounted=Yes, PackageDescription="2x 2mm Red LED PCB Edge Mounting (Without positioning pins) DIALIGHT 571 Serie", Part Description="Dual 2mm Green LEDs CBI® Circuit Board Indicator (Without positioning pins)", Part Number=LED_DIALIGHT_571-0122F, Pin Count=4, PressFit=No, Sense=No, SMD=No, Socket=No
PM1: "10W 230V AC-AC  Power Adaptor", Manufacturer="Ideal Power", Part Number=AC_AC_77DE-06-09, Author=GK, Bonding=No, ComponentHeight=21.5mm, Component Type=Standard, CreateDate=14.02.2018, Device=77DE-06-09, HelpURL=\\cern.ch\dfs\Applications\Altium\Datasheets\IRM-10-12.pdf, LatestRevisionDate=14.02.2018, Manufacturer Part Number=77DE-06-09, Mounted=Yes, PackageDescription="AC/AC Power Supply, Euro, 230 V, 10 W, 9 VAC, 670 mA", Part Description="AC/AC Power Supply, Euro, 230 V, 10 W, 9 VAC, 670 mA", Pin Count=0, PressFit=No, Sense=No, SMD=No, Socket=No, Status=None
PM2: "4W  110V AC-AC  Power Adaptor", Manufacturer="Ideal Power", Part Number=AC_AC_WAU12-200, Author=GK, Bonding=No, ComponentHeight=21.5mm, Component Type=Standard, CreateDate=14.02.2018, Device=WAU12-200, HelpURL=\\cern.ch\dfs\Applications\Altium\Datasheets\IRM-10-12.pdf, LatestRevisionDate=14.02.2018, Manufacturer Part Number=WAU12-200, Mounted=Yes, PackageDescription="AC/AC Power Supply, Euro, 110 V, 4 W, 12 VAC, 200 mA", Part Description="AC/AC Power Supply, Euro, 110 V, 4 W, 12 VAC, 200 mA", Pin Count=0, PressFit=No, Sense=No, SMD=No, Socket=No, Status=None
R1: library part R0603_330K_1%_0.1W_100PPM, "Resistor - 1%", Case=0603, Manufacturer=GENERIC, Manufacturer1 ComponentHeight=0.55mm, Manufacturer1 Example="NIC COMPONENT", Manufacturer1 Part Number=NRC06F3303TRF, Power=0.1W, Tolerance=±1%, Author="CERN DEM JLC", Component Type=Standard, CreateDate=03.12.2007, HelpURL=\\cern.ch\dfs\Applications\Altium\Datasheets\R0603_NIC_NRC.pdf, LatestRevisionDate=13.03.2008, Manufacturer Part Number=R0603_330K_1%_0.1W_100PPM, Mounted=Yes, Part Description="General Purpose Thick Film Chip Resistor", Part Number=R0603_330K_1%_0.1W_100PPM, Pin Count=2, PressFit=No, Sense=No, SMD=Yes, Socket=No, Status=Preferred, TC=±100ppm/°C
R2: library part R0603_100K_1%_0.1W_100PPM, "Resistor - 1%", Case=0603, Manufacturer=GENERIC, Manufacturer1 ComponentHeight=0.55mm, Manufacturer1 Example="NIC COMPONENT", Manufacturer1 Part Number=NRC06F1003TRF, Power=0.1W, Tolerance=±1%, Author="CERN DEM JLC", Component Type=Standard, CreateDate=03.12.2007, HelpURL=\\cern.ch\dfs\Applications\Altium\Datasheets\R0603_NIC_NRC.pdf, LatestRevisionDate=13.03.2008, Manufacturer Part Number=R0603_100K_1%_0.1W_100PPM, Mounted=Yes, Part Description="General Purpose Thick Film Chip Resistor", Part Number=R0603_100K_1%_0.1W_100PPM, Pin Count=2, PressFit=No, Sense=No, SMD=Yes, Socket=No, Status=Preferred, TC=±100ppm/°C
R3 R4 R18: library part R0603_1k_1%_0.1W_100PPM, "Resistor - 1%", Case=0603, Manufacturer=GENERIC, Manufacturer1 ComponentHeight=0.55mm, Manufacturer1 Example="NIC COMPONENT", Manufacturer1 Part Number=NRC06F1001TRF, Manufacturer Part Number=R0603_1K_1%_0.1W_100PPM, Power=0.1W, Tolerance=±1%, Author="CERN DEM JLC", Component Type=Standard, CreateDate=03.12.2007, HelpURL=\\cern.ch\dfs\Applications\Altium\Datasheets\R0603_NIC_NRC.pdf, LatestRevisionDate=13.03.2008, Mounted=Yes, Part Description="General Purpose Thick Film Chip Resistor", Part Number=R0603_1K_1%_0.1W_100PPM, Pin Count=2, PressFit=No, Sense=No, SMD=Yes, Socket=No, Status=Preferred, TC=±100ppm/°C
R5 R10 R28: library part R0603_510K_1%_0.1W_100PPM, "Resistor - 1%", Case=0603, Manufacturer=GENERIC, Manufacturer1 ComponentHeight=0.55mm, Manufacturer1 Example="NIC COMPONENT", Manufacturer1 Part Number=NRC06F5103TRF, Power=0.1W, Tolerance=±1%, Author="CERN DEM JLC", Component Type=Standard, CreateDate=03.12.2007, HelpURL=\\cern.ch\dfs\Applications\Altium\Datasheets\R0603_NIC_NRC.pdf, LatestRevisionDate=13.03.2008, Manufacturer Part Number=R0603_510K_1%_0.1W_100PPM, Mounted=Yes, Part Description="General Purpose Thick Film Chip Resistor", Part Number=R0603_510K_1%_0.1W_100PPM, Pin Count=2, PressFit=No, Sense=No, SMD=Yes, Socket=No, Status=Preferred, TC=±100ppm/°C
R6 R11 R17 R19: library part R0603_6K8_1%_0.1W_100PPM, "Resistor - 1%", Case=0603, Manufacturer=GENERIC, Manufacturer1 ComponentHeight=0.55mm, Manufacturer1 Example="NIC COMPONENT", Manufacturer1 Part Number=NRC06F6801TRF, Power=0.1W, Tolerance=±1%, Author="CERN DEM JLC", Component Type=Standard, CreateDate=03.12.2007, HelpURL=\\cern.ch\dfs\Applications\Altium\Datasheets\R0603_NIC_NRC.pdf, LatestRevisionDate=13.03.2008, Manufacturer Part Number=R0603_6K8_1%_0.1W_100PPM, Mounted=Yes, Part Description="General Purpose Thick Film Chip Resistor", Part Number=R0603_6K8_1%_0.1W_100PPM, Pin Count=2, PressFit=No, Sense=No, SMD=Yes, Socket=No, Status=Preferred, TC=±100ppm/°C
R7 R23: library part R0603_910K_1%_0.1W_100PPM, "Resistor - 1%", Case=0603, Manufacturer=GENERIC, Manufacturer1 ComponentHeight=0.55mm, Manufacturer1 Example="NIC COMPONENT", Manufacturer1 Part Number=NRC06F9103TRF, Power=0.1W, Tolerance=±1%, Author="CERN DEM JLC", Component Type=Standard, CreateDate=03.12.2007, HelpURL=\\cern.ch\dfs\Applications\Altium\Datasheets\R0603_NIC_NRC.pdf, LatestRevisionDate=13.03.2008, Manufacturer Part Number=R0603_910K_1%_0.1W_100PPM, Mounted=Yes, Part Description="General Purpose Thick Film Chip Resistor", Part Number=R0603_910K_1%_0.1W_100PPM, Pin Count=2, PressFit=No, Sense=No, SMD=Yes, Socket=No, Status=Preferred, TC=±100ppm/°C
R8 R24: library part R0603_1M5_1%_0.1W_100PPM, "Resistor - 1%", Case=0603, Manufacturer=GENERIC, Manufacturer1 ComponentHeight=0.55mm, Manufacturer1 Example="NIC COMPONENT", Manufacturer1 Part Number=NRC06F1504TRF, Power=0.1W, Tolerance=±1%, Author="CERN DEM JLC", Component Type=Standard, CreateDate=03.12.2007, HelpURL=\\cern.ch\dfs\Applications\Altium\Datasheets\R0603_NIC_NRC.pdf, LatestRevisionDate=13.03.2008, Manufacturer Part Number=R0603_1M5_1%_0.1W_100PPM, Mounted=Yes, Part Description="General Purpose Thick Film Chip Resistor", Part Number=R0603_1M5_1%_0.1W_100PPM, Pin Count=2, PressFit=No, Sense=No, SMD=Yes, Socket=No, Status=Preferred, TC=±100ppm/°C
R9 R25: library part R0603_430K_1%_0.1W_100PPM, "Resistor - 1%", Case=0603, Manufacturer=GENERIC, Manufacturer1 ComponentHeight=0.55mm, Manufacturer1 Example="NIC COMPONENT", Manufacturer1 Part Number=NRC06F4303TRF, Power=0.1W, Tolerance=±1%, Author="CERN DEM JLC", Component Type=Standard, CreateDate=03.12.2007, HelpURL=\\cern.ch\dfs\Applications\Altium\Datasheets\R0603_NIC_NRC.pdf, LatestRevisionDate=13.03.2008, Manufacturer Part Number=R0603_430K_1%_0.1W_100PPM, Mounted=Yes, Part Description="General Purpose Thick Film Chip Resistor", Part Number=R0603_430K_1%_0.1W_100PPM, Pin Count=2, PressFit=No, Sense=No, SMD=Yes, Socket=No, Status=Preferred, TC=±100ppm/°C
R12: library part R0603_180K_1%_0.1W_100PPM, "Resistor - 1%", Case=0603, Manufacturer=GENERIC, Manufacturer1 ComponentHeight=0.55mm, Manufacturer1 Example="NIC COMPONENT", Manufacturer1 Part Number=NRC06F1803TRF, Power=0.1W, Tolerance=±1%, Author="CERN DEM JLC", Component Type=Standard, CreateDate=03.12.2007, HelpURL=\\cern.ch\dfs\Applications\Altium\Datasheets\R0603_NIC_NRC.pdf, LatestRevisionDate=13.03.2008, Manufacturer Part Number=R0603_180K_1%_0.1W_100PPM, Mounted=Yes, Part Description="General Purpose Thick Film Chip Resistor", Part Number=R0603_180K_1%_0.1W_100PPM, Pin Count=2, PressFit=No, Sense=No, SMD=Yes, Socket=No, Status=Preferred, TC=±100ppm/°C
R13: library part R0603_270K_1%_0.1W_100PPM, "Resistor - 1%", Case=0603, Manufacturer=GENERIC, Manufacturer1 ComponentHeight=0.55mm, Manufacturer1 Example="NIC COMPONENT", Manufacturer1 Part Number=NRC06F2703TRF, Power=0.1W, Tolerance=±1%, Author="CERN DEM JLC", Component Type=Standard, CreateDate=03.12.2007, HelpURL=\\cern.ch\dfs\Applications\Altium\Datasheets\R0603_NIC_NRC.pdf, LatestRevisionDate=13.03.2008, Manufacturer Part Number=R0603_270K_1%_0.1W_100PPM, Mounted=Yes, Part Description="General Purpose Thick Film Chip Resistor", Part Number=R0603_270K_1%_0.1W_100PPM, Pin Count=2, PressFit=No, Sense=No, SMD=Yes, Socket=No, Status=Preferred, TC=±100ppm/°C
R14: library part R0603_200K_1%_0.1W_100PPM, "Resistor - 1%", Case=0603, Manufacturer=GENERIC, Manufacturer1 ComponentHeight=0.55mm, Manufacturer1 Example="NIC COMPONENT", Manufacturer1 Part Number=NRC06F2003TRF, Power=0.1W, Tolerance=±1%, Author="CERN DEM JLC", Component Type=Standard, CreateDate=03.12.2007, HelpURL=\\cern.ch\dfs\Applications\Altium\Datasheets\R0603_NIC_NRC.pdf, LatestRevisionDate=13.03.2008, Manufacturer Part Number=R0603_200K_1%_0.1W_100PPM, Mounted=Yes, Part Description="General Purpose Thick Film Chip Resistor", Part Number=R0603_200K_1%_0.1W_100PPM, Pin Count=2, PressFit=No, Sense=No, SMD=Yes, Socket=No, Status=Preferred, TC=±100ppm/°C
R15: library part R0603_240K_1%_0.1W_100PPM, "Resistor - 1%", Case=0603, Manufacturer=GENERIC, Manufacturer1 ComponentHeight=0.55mm, Manufacturer1 Example="NIC COMPONENT", Manufacturer1 Part Number=NRC06F2403TRF, Power=0.1W, Tolerance=±1%, Author="CERN DEM JLC", Component Type=Standard, CreateDate=03.12.2007, HelpURL=\\cern.ch\dfs\Applications\Altium\Datasheets\R0603_NIC_NRC.pdf, LatestRevisionDate=13.03.2008, Manufacturer Part Number=R0603_240K_1%_0.1W_100PPM, Mounted=Yes, Part Description="General Purpose Thick Film Chip Resistor", Part Number=R0603_240K_1%_0.1W_100PPM, Pin Count=2, PressFit=No, Sense=No, SMD=Yes, Socket=No, Status=Preferred, TC=±100ppm/°C
R16 R22 R26: library part R0603_24K_1%_0.1W_100PPM, "Resistor - 1%", Case=0603, Manufacturer=GENERIC, Manufacturer1 ComponentHeight=0.55mm, Manufacturer1 Example="NIC COMPONENT", Manufacturer1 Part Number=NRC06F2402TRF, Power=0.1W, Tolerance=±1%, Author="CERN DEM JLC", Component Type=Standard, CreateDate=03.12.2007, HelpURL=\\cern.ch\dfs\Applications\Altium\Datasheets\R0603_NIC_NRC.pdf, LatestRevisionDate=13.03.2008, Manufacturer Part Number=R0603_24K_1%_0.1W_100PPM, Mounted=Yes, Part Description="General Purpose Thick Film Chip Resistor", Part Number=R0603_24K_1%_0.1W_100PPM, Pin Count=2, PressFit=No, Sense=No, SMD=Yes, Socket=No, Status=Preferred, TC=±100ppm/°C
R20: library part R0603_10K_1%_0.1W_100PPM, "Resistor - 1%", Case=0603, Manufacturer=GENERIC, Manufacturer1 ComponentHeight=0.55mm, Manufacturer1 Example="NIC COMPONENT", Manufacturer1 Part Number=NRC06F1002TRF, Power=0.1W, Tolerance=±1%, Author="CERN DEM JLC", Component Type=Standard, CreateDate=03.12.2007, HelpURL=\\cern.ch\dfs\Applications\Altium\Datasheets\R0603_NIC_NRC.pdf, LatestRevisionDate=13.03.2008, Manufacturer Part Number=R0603_10K_1%_0.1W_100PPM, Mounted=Yes, Part Description="General Purpose Thick Film Chip Resistor", Part Number=R0603_10K_1%_0.1W_100PPM, Pin Count=2, PressFit=No, Sense=No, SMD=Yes, Socket=No, Status=Preferred, TC=±100ppm/°C
R21: library part R0603_20K_1%_0.1W_100PPM, "Resistor - 1%", Case=0603, Manufacturer=GENERIC, Manufacturer1 ComponentHeight=0.55mm, Manufacturer1 Example="NIC COMPONENT", Manufacturer1 Part Number=NRC06F2002TRF, Power=0.1W, Tolerance=±1%, Author="CERN DEM JLC", Component Type=Standard, CreateDate=03.12.2007, HelpURL=\\cern.ch\dfs\Applications\Altium\Datasheets\R0603_NIC_NRC.pdf, LatestRevisionDate=13.03.2008, Manufacturer Part Number=R0603_20K_1%_0.1W_100PPM, Mounted=Yes, Part Description="General Purpose Thick Film Chip Resistor", Part Number=R0603_20K_1%_0.1W_100PPM, Pin Count=2, PressFit=No, Sense=No, SMD=Yes, Socket=No, Status=Preferred, TC=±100ppm/°C
R27 R29: library part R0603_49R9_1%_0.1W_100PPM, "Resistor - 1%", Case=0603, Manufacturer=GENERIC, Manufacturer1 ComponentHeight=0.55mm, Manufacturer1 Example="YAGEO PHYCOMP", Manufacturer1 Part Number=RC0603FR-0749R9L, Power=0.1W, Tolerance=±1%, Author="CERN DEM JLC", Component Type=Standard, CreateDate=21.11.2017, HelpURL=\\cern.ch\dfs\Applications\Altium\Datasheets\R0603_PHYCOMP_RC0603.pdf, LatestRevisionDate=21.11.2017, Manufacturer Part Number=R0603_49R9_1%_0.1W_100PPM, Mounted=Yes, Part Description="General Purpose Thick Film Chip Resistor", Part Number=R0603_49R9_1%_0.1W_100PPM, Pin Count=2, PressFit=No, Sense=No, SMD=Yes, Socket=No, Status=Preferred, TC=±100ppm/°C
ST1: library part SCHROFF_PANEL_3U_4HP_Line_Trigger, "Schroff 3HP 4U EUROCARD Panel", Manufacturer=Schroff, Manufacturer Part Number=20818-017, Manufacturer Part Number 2=20848-664
SW1: library part STELVIO-KONTEK_3131730000400, "Jumper 1 Pin", Manufacturer=STELVIO-KONTEK, Manufacturer Part Number=3131730000400, Author="CERN DEM JLC", Component Type=Standard, ComponentHeight=6.5mm, CreateDate=27.08.2013, Family=Jumper, HelpURL=\\cern.ch\dfs\Applications\Altium\Datasheets\STELVIO-KONTEK_3131730000400.pdf, LatestRevisionDate=27.08.2013, Mounted=Yes, Part Description="Closed Insulated Black Jumper Pitch 2.54mm", Part Number=STELVIO-KONTEK_3131730000400, Pin Count=1, PressFit=No, SCEM=09.55.10.960.9, Sense=No, SMD=No, Socket=No, Status=None
W1: library part COMATEL_385.0358.1.03.400, "3 Mini Wire-Wrap Contact Strip Header", Manufacturer="KONTEK COMATEL", Manufacturer Part Number=385.0358.1.03.400, Author="CERN DEM JLC", Component Type=Standard, ComponentHeight=8mm, CreateDate=30.06.2010, Family="Test Point", HelpURL=\\cern.ch\dfs\Applications\Altium\Datasheets\COMATEL_385.0358.1.03.400.pdf, LatestRevisionDate=10.10.2012, Mounted=Yes, Part Description="3 Contacts Straight Strip Header Pitch 2.54mm L=6.3mm ''Mini-Wire-Wrap''", Part Number=COMATEL_385.0358.1.03.400, Pin Count=3, PressFit=No, Sense=No, SMD=No, Socket=No, Status="Not recommended"

## Via types
v1: diameter 0.5, hole 0.2, TOP to BOT, 76 vias

## Nets (pads, with @x,y where several pads share a name; then routed paths per layer and width w, separated by ;. In a path a pad name is that pad's centre, name@x,y a point inside that pad or via, vN(x,y) a via of type N, cw(c..) or ccw(c..) an arc to the next point about the centre after c; other vN are vias at no path point)
GND: C1.2 C2.1 C3.1 C4.1 C5.1 C6.1 C7.1 C8.1 C9.1 C11.1 C12.2 C13.2 C14.2 C15.2 C16.2 C26.2 C27.2 C28.2 C29.2 C30.1 C31.1 C33.1 C42.1 D3.1 D4.2 IC1.6 IC1.7 IC1.10 IC1.21 IC2.7 IC2.21 IC7.2 IC8.1 IC8.4 IC8.7 IC8.10 IC8.13 J2.2 J3.2 L3.3 LD1.2 LD1.3 R2.1 R17.1 R18.1 R19.1 R20.1 R21.1 R22.1 R23.1 R24.1 R25.1 R26.1 R28.1 | length 63.5
  TOP w0.2: v1(16.027,14.097) IC8.7 ; v1(16.027,17.831) 17.231,17.831 IC8.4 ; v1(16.027,21.717) IC8.1 ; v1(21.438,16.688) 22.657,16.688 IC8.10 ; v1(21.438,20.447) IC8.13
  TOP w0.254: v1(18.694,23.901) 19.76,23.901 C33.1 ; IC8.13 24.981,20.447 C42.1 ; v1(25.016,41.554) L3.3 27.397,41.478 v1(28.838,41.478) ; v1(27.834,13.309) IC7.2 27.834,10.653 R17.1 ; C16.2 28.41,16.637 v1(29.444,16.637) ; R26.1 31.496,16.573 v1(31.496,17.551) ; C29.2 v1(42.52,19.974) ; R28.1 v1(44.171,19.974) ; v1(45.212,5.41) 45.212,6.337 C15.2 ; C6.1 49.488,41.478 v1(52.476,41.478) ; C1.2 49.588,29.745 v1(52.476,29.745) ; C2.1 55.931,30.024 v1(55.931,31.217) ; C8.1 56.413,42.568 v1(56.413,43.815) ; v1(58.014,15.418) 58.014,14.465 R22.1 ; v1(59.487,24.892) C7.1 ; C9.1 v1(60.173,42.568) ; C31.1 61.176,34.239 v1(62.154,34.239) ; v1(61.57,30.886) 61.57,29.77 C3.1 ; C28.2 62.459,19.872 62.56,19.974 v1(62.56,20.041) ; v1(63.914,19.872) 63.914,19.806 64.084,19.636 R25.1 ; C14.2 65.126,6.414 v1(65.126,5.486) ; IC1.10 v1(65.214,30.024) ; v1(65.214,38.654) 65.864,39.304 IC2.7 ; IC1.7 v1(67.164,29.973) ; IC1.6 v1(68.428,29.082) ; R2.1 70.091,42.215 v1(71.12,42.215) ; v1(71.501,23.463) 71.501,24.23 C4.1 ; v1(73.827,23.223) 73.827,24.259 C5.1 ; C11.1 v1(74.016,41.173) ; v1(76.403,41.173) 76.403,40.208 C30.1 ; D4.2 v1(77.038,24.892) ; v1(78.308,14.605) 78.308,13.652 R21.1 ; D3.1 v1(79.985,41.666) ; v1(82.88,20.168) 82.88,19.266 C27.2 ; v1(83.236,27.419) R18.1 ; R24.1 84.633,19.19 v1(84.633,20.168) ; v1(85.979,5.817) C13.2 ; v1(87.147,24.384) 87.147,25.261 R19.1 ; v1(99.289,38.837) 99.289,37.782 C12.2 ; R20.1 v1(100.254,20.269) ; v1(100.254,24.46) 100.254,24.527 100.381,24.654 R23.1 ; C26.2 102.032,25.413 v1(102.032,24.308)
  other v1: 65.126,25.337 66.514,25.337 67.814,25.337 65.864,26.082 67.164,26.082 65.125,26.732 66.514,26.732 67.814,26.745 65.864,27.323 67.164,27.332 65.126,28.032 66.514,28.032 67.814,28.032 63.826,37.259 65.214,37.259 66.514,37.259 64.564,38.004 65.864,38.004 63.825,38.654 66.514,38.667 64.564,39.245 65.864,39.254 63.826,39.954 65.214,39.954 66.514,39.954
N5V0A: C10.2 C11.2 C26.1 C27.1 C28.1 C29.1 C30.2 D3.2 IC2.1 IC2.20 IC3.4 IC4.4 IC5.4 IC6.4 R1.2 R4.1 | length 153.2
  TOP w0.254: R4.1 16.294,25.4 17.92,27.026 26.492,27.026 28.118,25.4 38.175,25.4 40.613,22.962 v1(41.199,22.962) ; v1(41.257,20.853) 41.257,17.7 41.406,17.551 42.278,17.551 C29.1 ; IC6.4 42.748,17.514 43.294,18.059 61.634,18.059 62.434,17.259 C28.1 ; IC5.4 62.56,17.158 C28.1 ; IC2.20 67.415,36.304 67.564,36.453 IC2.1 67.94,37.354 68.09,37.204 R1.2 79.105,37.204 79.985,36.324 D3.2 80.633,35.351 80.633,31.957 81.114,31.475 85.979,31.475 86.16,31.294 86.16,20.904 ; IC4.4 83.439,17.132 82.956,17.615 C27.1 82.639,17.907 80.295,17.907 ; IC3.4 101.956,27.089 C26.1 103.01,27.038 104.47,25.578 104.47,23.495 102.565,21.59 93.929,21.59 93.243,20.904 86.16,20.904 ; C28.1 62.484,17.259 63.16,17.936 66.189,17.936 66.218,17.907 80.295,17.907 ; 80.295,17.907 80.295,20.198 81.001,20.904 86.16,20.904
  BOT w0.254: v1(41.199,22.962) 41.199,20.911 v1(41.257,20.853)
NetC1_1: C1.1 C2.2 D1.1 L1.1 | length 25.1
  TOP w0.254: D1.1 37.764,31.369 39.313,29.82 C1.1 40.513,28.346 41.653,27.206 57.552,27.206 L1.1
NetC3_2: C3.2 IC1.13 IC1.15 IC1.16 L1.2 | length 12.7
  TOP w0.254: L1.2 59.527,26.732 C3.2@61.582,26.732 ; C3.2 C3.2@61.582,26.732 ; IC1.15 64.164,24.609 ; IC1.13 C3.2@61.582,26.732 ; IC1.16 64.391,24.382 64.164,24.609 ; C3.2@61.582,26.732 61.29,26.44 61.29,24.152 61.439,24.003 62.941,24.003 63.547,24.609 64.164,24.609
NetC6_2: C6.2 C8.2 D2.2 L2.1 | length 25.1
  TOP w0.254: D2.2 37.161,43.503 39.237,41.427 C6.2 41.108,40.756 41.108,39.653 41.257,39.504 C8.2 L2.1
NetC7_2: C7.2 IC1.14 | length 2.6
  TOP w0.254: C7.2 62.116,24.917 63.28,26.082 IC1.14
NetC9_2: C9.2 IC2.13 IC2.15 IC2.16 L2.2 | length 14.7
  TOP w0.254: IC2.15 62.864,36.453 63.013,36.304 ; IC2.13 60.271,38.654 C9.2 58.762,38.556 L2.2 58.222,37.27 58.222,36.672 59.817,35.077 62.001,35.077 62.23,35.306 62.23,35.521 63.013,36.304 ; IC2.16 63.013,36.304
NetC10_1: C10.1 IC2.3 R1.1 R2.2 | length 5.9
  TOP w0.254: IC2.3 71.453,38.654 R1.1 ; C10.1 R2.2
NetC17_1: C17.1 C21.1 C34.1 C38.1 R12.2 R19.2 | length 13.4
  TOP w0.254: R12.2 87.033,30.328 87.72,29.642 C21.1@89.27,29.642 ; R19.2 87.553,26.658 C38.1 ; C34.1 89.227,35.308 89.227,32.606 C17.1 C21.1@89.27,29.642 ; C38.1@89.372,27.038 89.27,27.14 C21.1@89.27,29.642 ; C21.1 C21.1@89.27,29.642
NetC17_2: C17.2 C34.2 IC3.6 R7.2 R13.1 | length 14.9
  TOP w0.254: C34.2 94.227,35.308 94.227,32.606 C17.2 100.381,32.563 100.686,32.868 ; IC3.6 100.686,32.868 ; R13.1 102.946,31.521 101.6,32.868 100.686,32.868
NetC18_1: C18.1 C22.1 C35.1 C39.1 R13.2 R20.2 | length 29.3
  TOP w0.254: C35.1 96.988,8.788 96.988,11.684 C18.1 C22.1 97.013,17.336 101.981,17.336 105.816,21.171 R13.2
NetC18_2: C18.2 C35.2 IC4.6 R8.2 R14.1 | length 18.1
  TOP w0.254: R14.1 79.972,10.489 80.295,10.812 80.345,10.812 81.877,12.345 84.56,12.345 84.709,12.196 ; IC4.6 84.709,12.196 ; C35.2 91.963,11.659 C18.2 91.684,11.709 91.049,12.345 R8.2 84.858,12.345 84.709,12.196
NetC19_1: C19.1 C23.1 C36.1 C40.1 R14.2 R21.2 | length 13.6
  TOP w0.254: C36.1 C19.1 ; C40.1 75.944,16.726 75.944,13.983 C23.1 75.931,13.919 75.931,10.211 C19.1 ; R21.2 78.334,10.478 R14.2 78.118,10.185 C19.1
NetC19_2: C19.2 C36.2 IC5.6 R9.2 R15.1 | length 16.7
  TOP w0.254: R15.1 63.681,11.278 ; IC5.6 63.83,11.129 63.681,11.278 ; C36.2 C19.2 70.718,10.424 70.182,10.424 68.478,12.129 R9.2 64.532,12.129 63.681,11.278
NetC20_1: C20.1 C24.1 C37.1 C41.1 R15.2 R22.2 | length 12.6
  TOP w0.254: C20.1 55.599,11.062 55.599,8.191 C37.1 ; C41.1 55.586,14.021 C24.1 55.573,13.983 55.573,11.405 55.904,11.074 57.849,11.074 R15.2 R22.2
NetC20_2: C20.2 C37.2 IC6.6 R10.2 W1.1 | length 18.1
  TOP w0.254: W1.1 43.57,12.243 44.018,11.795 ; IC6.6 44.018,11.795 ; C37.2 50.599,8.191 50.599,11.062 C20.2 50.427,11.074 49.707,11.795 44.018,11.795
NetC21_2: C21.2 C38.2 IC3.2 R7.1 | length 10.1
  TOP w0.254: C38.2 94.417,26.704 94.417,29.687 94.586,29.856 95.503,29.856 96.394,30.747 R7.1 96.482,30.709 99.085,30.709 99.416,30.378 IC3.2
NetC22_2: C22.2 C39.2 IC4.2 R8.1 | length 10.8
  TOP w0.254: IC4.2 85.979,14.207 86.128,14.058 89.04,14.058 R8.1 91.124,13.945 C22.2 91.988,14.859 91.988,17.59 C39.2
NetC23_2: C23.2 C40.2 IC5.2 R9.1 | length 10.2
  TOP w0.254: IC5.2 65.1,14.058 65.43,13.729 R9.1 70.69,13.729 C23.2 70.944,13.983 70.944,16.726 C40.2
NetC24_2: C24.2 C41.2 IC6.2 R10.1 | length 10
  TOP w0.254: IC6.2 45.288,14.021 46,13.309 R10.1 49.647,13.309 50.333,13.995 C24.2 50.586,14.021 C41.2
NetC25_1: C25.1 SW1.1 W1.2 | length 4.5
  TOP w0.254: C25.1 34.696,16.105 34.696,15.306 35.22,14.783 W1.2
NetC25_2: C25.2 IC7.4 R16.1 R26.2 | length 8.5
  TOP w0.254: IC7.4 R26.2@31.445,14.914 ; R16.1 R26.2@31.445,14.914 ; R26.2 R26.2@31.445,14.914 ; C25.2 34.112,13.689 34.112,14.732 33.93,14.914 R26.2@31.445,14.914
NetC31_2: C31.2 IC2.14 | length 3.4
  TOP w0.254: C31.2 61.163,37.172 61.995,38.004 IC2.14
NetC32_1: C32.1 IC7.3 R5.1 R11.2 R17.2 | length 7.4
  TOP w0.254: IC7.3 29.444,12.314 29.592,12.166 29.592,10.511 R17.2 29.584,10.453 R17.2@29.592,10.445 ; C32.1 R17.2@29.592,10.445 ; R11.2 30.106,9.931 R17.2@29.592,10.445
NetC32_2: C32.2 IC7.1 IC8.2 IC8.5 IC8.9 IC8.12 R5.2 | length 31.4
  TOP w0.2: IC8.5 17.358,16.688 19.202,16.688 19.66,17.145 ; IC8.2 17.536,20.218 19.583,20.218 19.66,20.142 19.66,19.177 ; IC8.9 21.438,15.367 19.66,17.145 ; IC7.1 25.342,12.314 25.134,12.522 25.134,18.3 24.257,19.177 IC8.12 19.66,19.177 ; 19.66,17.145 19.66,19.177
  TOP w0.254: IC7.1 26.884,9.052 27.033,8.903 R5.2 27.984,7.373 C32.2
NetC33_2: C33.2 C42.2 IC8.14 L4.2 | length 6.4
  TOP w0.254: L4.2 24.421,23.825 C33.2 22.708,23.697 IC8.14 24.257,21.717 24.274,21.734 24.668,21.734 C42.2
NetD1_2: D1.2 D2.1 L3.4 R6.2 | length 61.6
  TOP w0.254: L3.4 30.912,44.094 32.283,42.723 32.283,40.301 33.081,39.504 35.332,39.504 D2.1 35.611,39.225 D1.2 35.748,35.331 39.802,35.331 42.57,32.563 70.688,32.563 72.873,30.378 R6.2@79.667,30.378
NetIC3_3: IC3.3 R23.2 | length 1.9
  TOP w0.254: R23.2 100.686,27.419 IC3.3
NetIC4_3: IC4.3 R24.2 | length 1.9
  TOP w0.254: R24.2 84.709,17.463 IC4.3
NetIC5_3: IC5.3 R25.2 | length 1.9
  TOP w0.254: IC5.3 63.83,16.955 R25.2
NetIC6_3: IC6.3 R28.2 | length 2
  TOP w0.254: IC6.3 44.018,17.132 R28.2
NetIC8_3: IC8.3 IC8.6 R27.1 | length 19
  TOP w0.254: R27.1 14.097,27.991 14.249,27.838 14.249,20.041 15.113,19.177 ; IC8.6 15.824,15.367 15.113,16.078 15.113,19.177 ; IC8.3 15.113,19.177
NetIC8_8: IC8.8 IC8.11 R29.1 | length 18.3
  TOP w0.254: R29.1 14.148,13.577 14.564,13.161 22.508,13.161 22.657,13.309 22.657,14.046 IC8.8 24.269,14.097 24.574,14.402 24.574,17.7 24.367,17.907 IC8.11
NetJ1_1: J1.1 L3.1 | length 6.1
  TOP w0.254: J1.1 16.566,44.094 L3.1
NetJ1_2: J1.2 L3.2 | length 13.5
  TOP w0.254: J1.2 16.953,38.125 17.358,38.531 17.358,40.736 18.177,41.554 L3.2
NetJ2_1: J2.1 R27.2 | length 7.5
  TOP w0.2: R27.2@10.361,27.851 R27.2@10.431,27.921